# EAGLE board motherboard_cp2 (EAGLE 6.4)
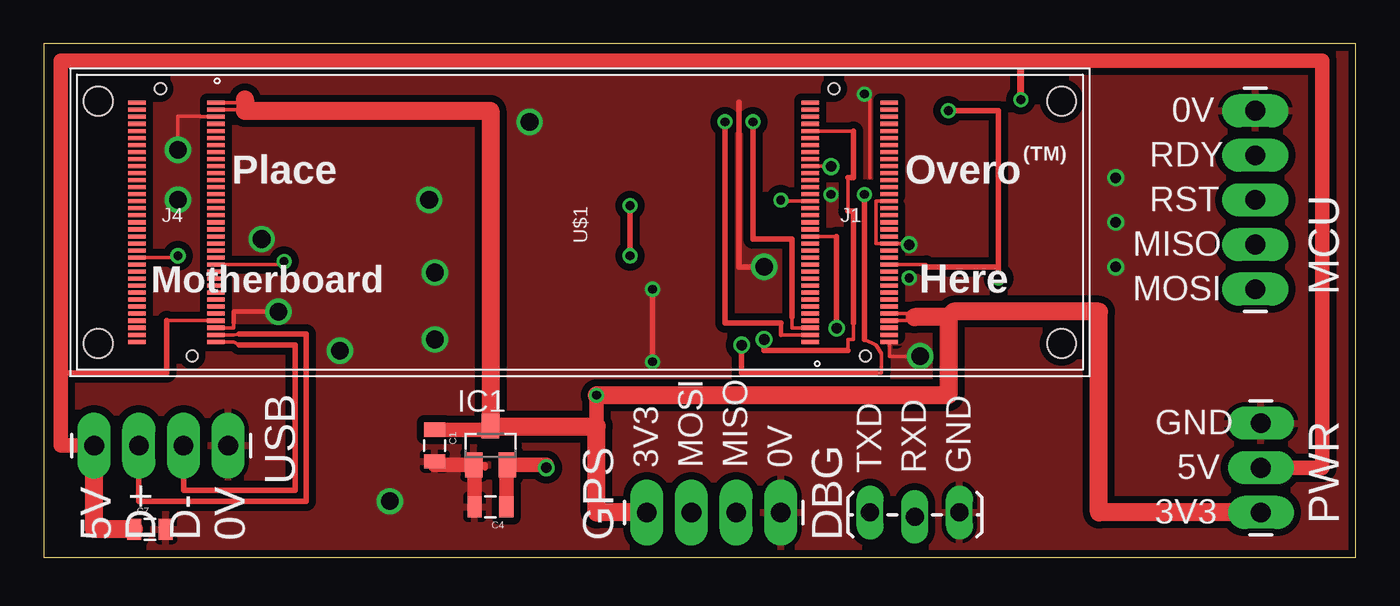
[diagram p0: board, top side]
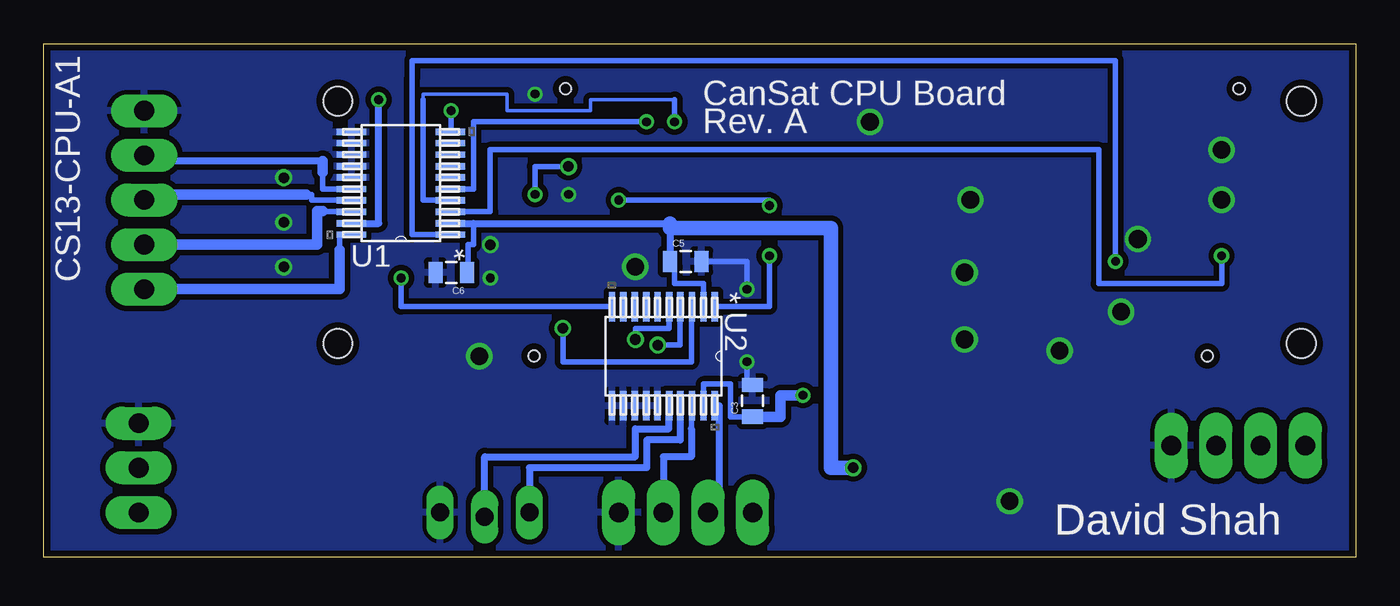
[diagram p1: board, bottom side, seen from below]

Size 74.6 x 29.2 mm. Coordinates in mm from the lower left corner, seen from the top.
Outline: 0,0 74.6,0 74.6,29.2 0,29.2 0,0
Copper layers (1*16): Top 0.0356mm / dielectric 1.5011mm / Bottom 0.0356mm
Design rules "LaenPCBOrder *": minimum track width 6mil, minimum drill 13mil, track to track 6mil, track to pad 6mil, pad to pad 6mil, via to via 6mil, smd to smd 6mil, copper to edge 15mil, drill to drill 6mil, minimum pad ring 7mil, minimum via ring 7mil, stop-mask expansion 4mil, vias tented up to drill 40mil, thermal gap 10mil

## Footprints (pad centres in the part's own frame; a part is rotated, then mirrored left to right if it is on the bottom)
0805 = smd 0.8 x 1.2: 1 -0.9,0; 2 0.9,0
1X03_LOCK_LONGPADS = drill 1.016 long: 1 0,0; 2 2.54,-0.254; 3 5.08,0
1X04_LONGPADS = drill 1.118 pad 1.88 long: 1 0,0; 2 2.54,0; 3 5.08,0; 4 7.62,0
SOT23 = smd 1 x 1.4: 1 -0.95,-1.1; 2 0.95,-1.1; 3 0,1.1
1X05_LONGPADS = drill 1.118 pad 1.88 long: 1 0,0; 2 2.54,0; 3 5.08,0; 4 7.62,0; 5 10.16,0
1X03_LONGPADS = drill 1.118 pad 1.88 long: 1 0,0; 2 2.54,0; 3 5.08,0
PW20 = smd 1.676 x 0.356: 1 -2.819,2.921; 2 -2.819,2.286; 3 -2.819,1.626; 4 -2.819,0.965; 5 -2.819,0.33; 6 -2.819,-0.33; 7 -2.819,-0.965; 8 -2.819,-1.626; 9 -2.819,-2.286; 10 -2.819,-2.921; 11 2.819,-2.921; 12 2.819,-2.286; 13 2.819,-1.626; 14 2.819,-0.965; 15 2.819,-0.33; 16 2.819,0.33; 17 2.819,0.965; 18 2.819,1.626; 19 2.819,2.286; 20 2.819,2.921
OVERO = smd 1 x 0.23: J1_1 13.1,-6.8; J1_2 13.1,-6.4; J1_3 13.1,-6; J1_4 13.1,-5.6; J1_5 13.1,-5.2; J1_6 13.1,-4.8; J1_7 13.1,-4.4; J1_8 13.1,-4; J1_9 13.1,-3.6; J1_10 13.1,-3.2; J1_11 13.1,-2.8; J1_12 13.1,-2.4; J1_13 13.1,-2; J1_14 13.1,-1.6; J1_15 13.1,-1.2; J1_16 13.1,-0.8; J1_17 13.1,-0.4; J1_18 13.1,0; J1_19 13.1,0.4; J1_20 13.1,0.8; J1_21 13.1,1.2; J1_22 13.1,1.6; J1_23 13.1,2; J1_24 13.1,2.4; J1_25 13.1,2.8; J1_26 13.1,3.2; J1_27 13.1,3.6; J1_28 13.1,4; J1_29 13.1,4.4; J1_30 13.1,4.8; J1_31 13.1,5.2; J1_32 13.1,5.6; J1_33 13.1,6; J1_34 13.1,6.4; J1_35 13.1,6.8; J1_36 17.6,6.8; J1_37 17.6,6.4; J1_38 17.6,6; J1_39 17.6,5.6; J1_40 17.6,5.2; J1_41 17.6,4.8; J1_42 17.6,4.4; J1_43 17.6,4; J1_44 17.6,3.6; J1_45 17.6,3.2; J1_46 17.6,2.8; J1_47 17.6,2.4; J1_48 17.6,2; J1_49 17.6,1.6; J1_50 17.6,1.2; J1_51 17.6,0.8; J1_52 17.6,0.4; J1_53 17.6,0; J1_54 17.6,-0.4; J1_55 17.6,-0.8; J1_56 17.6,-1.2; J1_57 17.6,-1.6; J1_58 17.6,-2; J1_59 17.6,-2.4; J1_60 17.6,-2.8; J1_61 17.6,-3.2; J1_62 17.6,-3.6; J1_63 17.6,-4; J1_64 17.6,-4.4; J1_65 17.6,-4.8; J1_66 17.6,-5.2; J1_67 17.6,-5.6; J1_68 17.6,-6; J1_69 17.6,-6.4; J1_70 17.6,-6.8; J4_1 -20.7,6.8; J4_2 -20.7,6.4; J4_3 -20.7,6; J4_4 -20.7,5.6; J4_5 -20.7,5.2; J4_6 -20.7,4.8; J4_7 -20.7,4.4; J4_8 -20.7,4; J4_9 -20.7,3.6; J4_10 -20.7,3.2; J4_11 -20.7,2.8; J4_12 -20.7,2.4; J4_13 -20.7,2; J4_14 -20.7,1.6; J4_15 -20.7,1.2; J4_16 -20.7,0.8; J4_17 -20.7,0.4; J4_18 -20.7,0; J4_19 -20.7,-0.4; J4_20 -20.7,-0.8; J4_21 -20.7,-1.2; J4_22 -20.7,-1.6; J4_23 -20.7,-2; J4_24 -20.7,-2.4; J4_25 -20.7,-2.8; J4_26 -20.7,-3.2; J4_27 -20.7,-3.6; J4_28 -20.7,-4; J4_29 -20.7,-4.4; J4_30 -20.7,-4.8; J4_31 -20.7,-5.2; J4_32 -20.7,-5.6; J4_33 -20.7,-6; J4_34 -20.7,-6.4; J4_35 -20.7,-6.8; J4_36 -25.2,-6.8; J4_37 -25.2,-6.4; J4_38 -25.2,-6; J4_39 -25.2,-5.6; J4_40 -25.2,-5.2; J4_41 -25.2,-4.8; J4_42 -25.2,-4.4; J4_43 -25.2,-4; J4_44 -25.2,-3.6; J4_45 -25.2,-3.2; J4_46 -25.2,-2.8; J4_47 -25.2,-2.4; J4_48 -25.2,-2; J4_49 -25.2,-1.6; J4_50 -25.2,-1.2; J4_51 -25.2,-0.8; J4_52 -25.2,-0.4; J4_53 -25.2,0; J4_54 -25.2,0.4; J4_55 -25.2,0.8; J4_56 -25.2,1.2; J4_57 -25.2,1.6; J4_58 -25.2,2; J4_59 -25.2,2.4; J4_60 -25.2,2.8; J4_61 -25.2,3.2; J4_62 -25.2,3.6; J4_63 -25.2,4; J4_64 -25.2,4.4; J4_65 -25.2,4.8; J4_66 -25.2,5.2; J4_67 -25.2,5.6; J4_68 -25.2,6; J4_69 -25.2,6.4; J4_70 -25.2,6.8 | hole 1.65: 27.4,6.9; 27.4,-6.9; -27.4,6.9; -27.4,-6.9 | hole 0.65: -23.85,7.6; -22.05,-7.6; 14.45,7.6; 16.25,-7.6

## Placement (x,y rotation side)
C1  1uF  [0805]  22.23,6.35 270 top
C3  1uF  [0805]  34.29,8.89 90 bottom
C4  1uF  [0805]  25.4,2.86 180 top
C5  1uF  [0805]  38.1,16.83 0 bottom
C6  1uF  [0805]  51.44,16.19 180 bottom
C7  1uF  [0805]  6.03,1.59 0 top
DEBUG  [1X03_LOCK_LONGPADS]  46.99,2.54 0 top
GPS  [1X04_LONGPADS]  34.29,2.54 0 top
IC1  MCP1703CB  [SOT23]  25.4,6.35 0 top
MCU  [1X05_LONGPADS]  68.9,15.24 90 top
PWR  [1X03_LONGPADS]  69.22,2.54 90 top
U1  TXS0108E_PW_20  [PW20]  54.29,21.27 180 bottom
U2  TXS0108E_PW_20  [PW20]  39.37,11.43 270 bottom
U$1  OVERO  [OVERO]  30.48,19.05 0 top
USB  [1X04_LONGPADS]  2.86,6.35 0 top

## Library data of the parts
C1 C3-C7 = SparkFun-Capacitors; PROD_ID: CAP-08064
DEBUG GPS MCU PWR USB = SparkFun-Connectors
IC1 = linear
U1 U2 = txs0108e; DATASHEETURL: http://www.ti.com/lit/gpn/TXS0108E; DESCRIPTION: 8-Bit Bidirectional Voltage-Level Translator For Open-Drain And Push-Pull Application; FAMILY_NAME: AUTO DIRECTION SENSING DUAL SUPPLY TRANSLATOR; GENERIC_PART_NUMBER: TXS0108E; INDUSTRY_STD_PKG_TYPE: TSSOP; MANUFACTURER: Texas Instruments; MANUFACTURER_PART_NUMBER: txs0108e_pw_20; PACKAGE_DESIGNATOR: PW; PIN_COUNT: 20; VENDOR: Texas Instruments
U$1 = overo

## Nets
1.8V: C4.1 C5.1 C6.1 IC1.2 U1.2 U2.2
3.3V: C1.1 C3.1 GPS.1 IC1.3 PWR.1 U2.19 U$1.J1_66 U$1.J1_67 U$1.J4_1 U$1.J4_2
5V: C7.1 PWR.2 U1.19 U$1.J4_32 USB.1
DBG_RXD: DEBUG.2 U2.16
DBG_TXD: DEBUG.1 U2.17
GND: C1.2 C3.2 C4.2 C5.2 C6.2 C7.2 DEBUG.3 GPS.4 IC1.1 MCU.5 PWR.3 U1.11 U1.12 U1.13 U1.14 U1.15 U2.11 U2.12 U2.13 U2.14 U2.15 U$1.J1_50 U$1.J1_56 U$1.J1_70 U$1.J4_3 U$1.J4_33 USB.4
GPS_RXD: GPS.3 U2.18
GPS_TXD: GPS.2 U2.20
MCU_RDY: MCU.4 U1.16
MCU_RST: MCU.3 U1.17
MCU_RXD: MCU.2 U1.18
MCU_TXD: MCU.1 U1.20
RDY: U1.5 U$1.J1_3
SCL: U$1.J1_13
SDA: U$1.J1_10
SYSEN: U1.10 U2.10 U$1.J1_59
UART1_RTS: U1.4 U$1.J1_2
UART1_RXD: U1.3 U$1.J4_48
UART1_TXD: U1.1 U$1.J4_24
UART2_RXD: U2.3 U$1.J1_16
UART2_TXD: U2.1 U$1.J1_21
UART3_RXD: U2.5 U$1.J1_31
UART3_TXD: U2.4 U$1.J1_26
USB_DM: U$1.J4_35 USB.3
USB_DP: U$1.J4_34 USB.2

## Tracks (layer width: path | path; a pad name or v marks a point on that pad's centre or on a via)
1.8V  (via drill 0.6)
  Top 0.813: C4.1 26.3,5.25 IC1.2 28.57,5.25 v28.57,5.08
  Bottom 0.305: C5.1 38.73,16.51 38.73,15.56 37.08,15.56 U2.2 | 50.16,18.99 50.16,17.78 50.48,17.78 50.48,16.19 C6.1
  Bottom 0.406: U1.2 50.16,18.99 39,18.99 C5.1
  Bottom 0.813: v28.57,5.08 29.84,5.08 29.84,18.73 39,18.73 39,18.99
3.3V  (via drill 0.5)
  Top 0.203: U$1.J4_1 11.11,25.85 | U$1.J4_2 11.75,25.45 11.75,25.4 | U$1.J1_66 49.53,13.85 | U$1.J1_67 49.33,13.45 49.53,13.65
  Top 0.305: 50.48,13.45 49.53,13.65 49.53,13.85 | 11.11,25.85 11.11,26.04 11.43,26.04 | 11.11,25.45 11.11,25.4 11.43,25.4 | 51.12,13.45 51.12,13.34 51.75,13.34 51.75,13.97
  Top 0.813: C1.1 25.4,7.25 IC1.3 | 31.43,7.45 v31.43,9.21
  Top 1.016: PWR.1 60.01,2.54 60.01,13.97 51.75,13.97 51.44,13.65 | 51.44,13.65 49.53,13.65 | 11.43,26.04 11.43,25.4 11.75,25.4 25.4,25.4 IC1.3 31.43,7.45 31.43,2.54 GPS.1 | 51.44,13.65 51.44,9.21 v31.43,9.21
  Bottom 0.305: C3.1 35.56,7.99 35.56,9.84 37.08,9.84 U2.19
  Bottom 0.61: C3.1 32.7,7.99 32.7,9.21 v31.43,9.21
5V  (via drill 0.5)
  Top 0.203: 6.99,13.45 U$1.J4_32
  Top 0.305: 6.99,13.45 6.99,10.48 0.95,10.48
  Top 0.406: v55.56,26.04 55.56,28.26
  Top 0.813: USB.1 0.95,6.35 0.95,10.48 0.95,28.26 55.56,28.26 72.71,28.26 72.71,5.08 PWR.2
  Top 1.016: C7.1 2.86,1.59 USB.1
  Bottom 0.406: U1.19 55.56,18.99 v55.56,26.04
DBG_RXD
  Bottom 0.406: DEBUG.2 49.53,5.71 40.96,5.71 40.96,7.3 39.05,7.3 39.05,7.94 39.04,7.94 U2.16
DBG_TXD
  Bottom 0.406: U2.17 38.42,8.61 38.42,6.67 40.32,6.67 40.32,5.08 46.99,5.08 DEBUG.1
GND  (via drill 0.5, 0.6, 1)
  Top 0.203: U$1.J4_33 10.79,13.05 10.79,13.34 | U$1.J4_3 8.89,25.05 8.89,25.08 7.62,25.08 v7.62,23.18 | v46.67,26.35 46.99,26.35 46.99,21.59 | v49.85,11.43 48.08,11.43 U$1.J1_70 | 49.21,18.1 49.21,17.85 U$1.J1_56 47.31,17.85 47.31,20.25 U$1.J1_50
  Top 0.254: 10.79,13.34 10.79,13.97 v13.34,13.97
  Top 0.305: 24.5,5.25 25.08,5.25 25.08,5.08 | v40.96,16.51 39.53,16.51 39.53,25.88 | v34.61,15.24 v34.61,11.11
  Top 0.813: C1.2 22.23,5.25 IC1.1 24.5,5.25 C4.2
  Bottom 0.305: C5.2 34.61,16.83 v34.61,15.24 | C3.2 34.61,9.79 v34.61,11.11
  other vias: 22.23,12.38 22.23,16.19 21.91,20.32 19.68,3.17 16.83,11.75 12.38,18.1 7.62,20.32 27.62,24.77 49.21,15.88 44.77,20.64 60.96,21.59 60.96,19.05 60.96,16.51 49.21,17.78
  pour Bottom (isolate 0.305): 0,29.53 -0.32,-0.64 75.25,-0.64 75.25,29.53
  pour Top (isolate 0.406): -4.13,30.16 -4.13,-2.54 77.47,-2.54 77.47,30.8 -4.13,30.8
GPS_RXD
  Bottom 0.305: U2.18 37.78,8.61 37.78,7.3
  Bottom 0.406: 37.78,7.3 37.78,5.71 39.37,5.71 GPS.3
GPS_TXD
  Bottom 0.406: U2.20 36.2,8.61 36.2,2.54 GPS.2
MCU_RDY
  Bottom 0.305: U1.16 58.74,20.94 58.74,21.91
  Bottom 0.406: 58.74,22.54 68.9,22.54
  Bottom 0.61: 58.74,21.91 58.74,22.54 | 68.9,22.54 MCU.4
MCU_RST
  Bottom 0.305: U1.17 59.37,20.31 59.37,20.64 59.69,20.64
  Bottom 0.61: 59.69,20.64 68.9,20.64 MCU.3
MCU_RXD
  Bottom 0.305: U1.18 58.74,19.65 58.74,19.68
  Bottom 0.61: 58.74,19.68 59.05,19.68 59.05,17.78 MCU.2
MCU_TXD
  Bottom 0.305: U1.20 57.78,18.35 57.78,17.46
  Bottom 0.61: 57.78,17.46 57.78,15.24 MCU.1
RDY  (via drill 0.5)
  Top 0.203: U$1.J1_3 42.55,13.05 42.55,13.65
  Top 0.305: v40.32,24.77 40.32,18.1 42.55,18.1 42.55,13.65
  Bottom 0.305: U1.5 50.16,20.94 50.16,24.77 v40.32,24.77
SYSEN  (via drill 0.5)
  Top 0.203: U$1.J1_59 50.16,16.65 50.16,16.51
  Top 0.305: v51.44,25.4 54.29,25.4 54.29,17.14 54.29,16.51 | 54.29,16.51 v54.29,15.88 | 50.16,16.51 54.29,16.51
  Bottom 0.305: U2.10 54.29,14.25 v54.29,15.88 | U1.10 51.44,24.19 v51.44,25.4
UART1_RTS  (via drill 0.5)
  Top 0.203: 41.91,12.65 U$1.J1_2
  Top 0.254: 41.91,12.65 41.91,13.34
  Top 0.305: v38.73,24.77 38.73,13.34 41.91,13.34
  Bottom 0.203: 38.73,26.04 43.5,26.04 43.5,25.4 48.26,25.4 48.26,26.35 53.02,26.35 53.02,26.04
  Bottom 0.305: U1.4 53.02,20.31 53.02,26.04 | 38.73,26.04 v38.73,24.77
UART1_RXD  (via drill 0.5)
  Top 0.203: U$1.J4_48 7.62,17.05
  Top 0.305: 7.62,17.05 v7.62,17.14
  Bottom 0.305: U1.3 49.21,19.65 49.21,22.86 49.21,23.18 14.61,23.18 14.61,15.56 7.62,15.56 v7.62,17.14
UART1_TXD  (via drill 0.5)
  Top 0.203: U$1.J4_24 13.65,16.65
  Top 0.305: 13.65,16.65 v13.65,16.83
  Bottom 0.305: U1.1 53.66,18.35 53.66,26.04 53.66,27.3 53.66,28.26 13.65,28.26 v13.65,16.83
UART2_RXD  (via drill 0.6)
  Top 0.203: U$1.J1_16 45.09,18.25
  Top 0.305: 45.09,18.25 45.09,18.1 v45.09,13.02
  Bottom 0.305: U2.3 37.78,14.25 37.78,11.11 45.09,11.11 v45.09,13.02
UART2_TXD  (via drill 0.5)
  Top 0.203: U$1.J1_21 41.91,20.25 v41.91,20.32
  Top 0.305: v33.34,17.14 v33.34,20
  Bottom 0.305: 36.51,14.25 U2.1 33.34,14.25 v33.34,17.14 | v41.91,20.32 33.34,20.32 v33.34,20
UART3_RXD  (via drill 0.6)
  Top 0.203: 45.72,19.68 45.72,21.59 | 45.72,11.75 45.72,12.38 46.04,12.38 46.04,13.34 | U$1.J1_31 46.04,24.25
  Top 0.305: 45.72,11.75 40.96,11.75 v40.96,12.38 | 46.04,24.25 46.04,24.13 46.04,21.59 45.72,21.59 | 45.72,19.68 46.04,19.68 46.04,13.34
  Bottom 0.305: U2.5 39.05,14.25 39.05,13.02 40.96,13.02 v40.96,12.38
UART3_TXD  (via drill 0.5, 0.6)
  Top 0.203: U$1.J1_26 44.77,22.25 | 47.31,10.48 47.62,10.48 47.62,11.59 47.31,12.06 46.67,12.38
  Top 0.305: 44.77,22.25 v44.77,22.23 | 47.31,10.48 39.69,10.48 v39.69,12.06 | 46.67,12.38 v46.67,20.64
  Bottom 0.305: U2.4 38.42,14.25 38.42,12.06 v39.69,12.06 | v44.77,22.23 46.67,22.23 v46.67,20.64
USB_DM
  Top 0.203: U$1.J4_35 10.79,12.25 11.11,12.06
  Top 0.305: USB.3 7.94,3.81 14.29,3.81 14.29,12.06 11.11,12.06
USB_DP
  Top 0.203: U$1.J4_34 10.79,12.65 11.11,12.7
  Top 0.305: USB.2 5.4,3.17 14.92,3.17 14.92,12.7 11.11,12.7

## Text on the board
tNames: 0V | RDY | RST | MISO | MOSI | MCU | GND | 3V3 | MOSI | MISO | 0V | TXD | RXD | GND | USB | 5V | 3V3 | PWR | 5V | D+ | D- | 0V | GPS | DBG
bNames: CS13-CPU-A1 | CanSat CPU Board | Rev. A | David Shah